# Altium PCB VirtualWire_BreadBoard.PcbDoc
Units mil, origin at the board's own origin, x right, y up, seen from the top; angles counter-clockwise.
Board outline 1550 x 950 mil, 2 copper layers (Top Layer, Bottom Layer); 1 components, 0 nets, 50 pads, 0 vias.
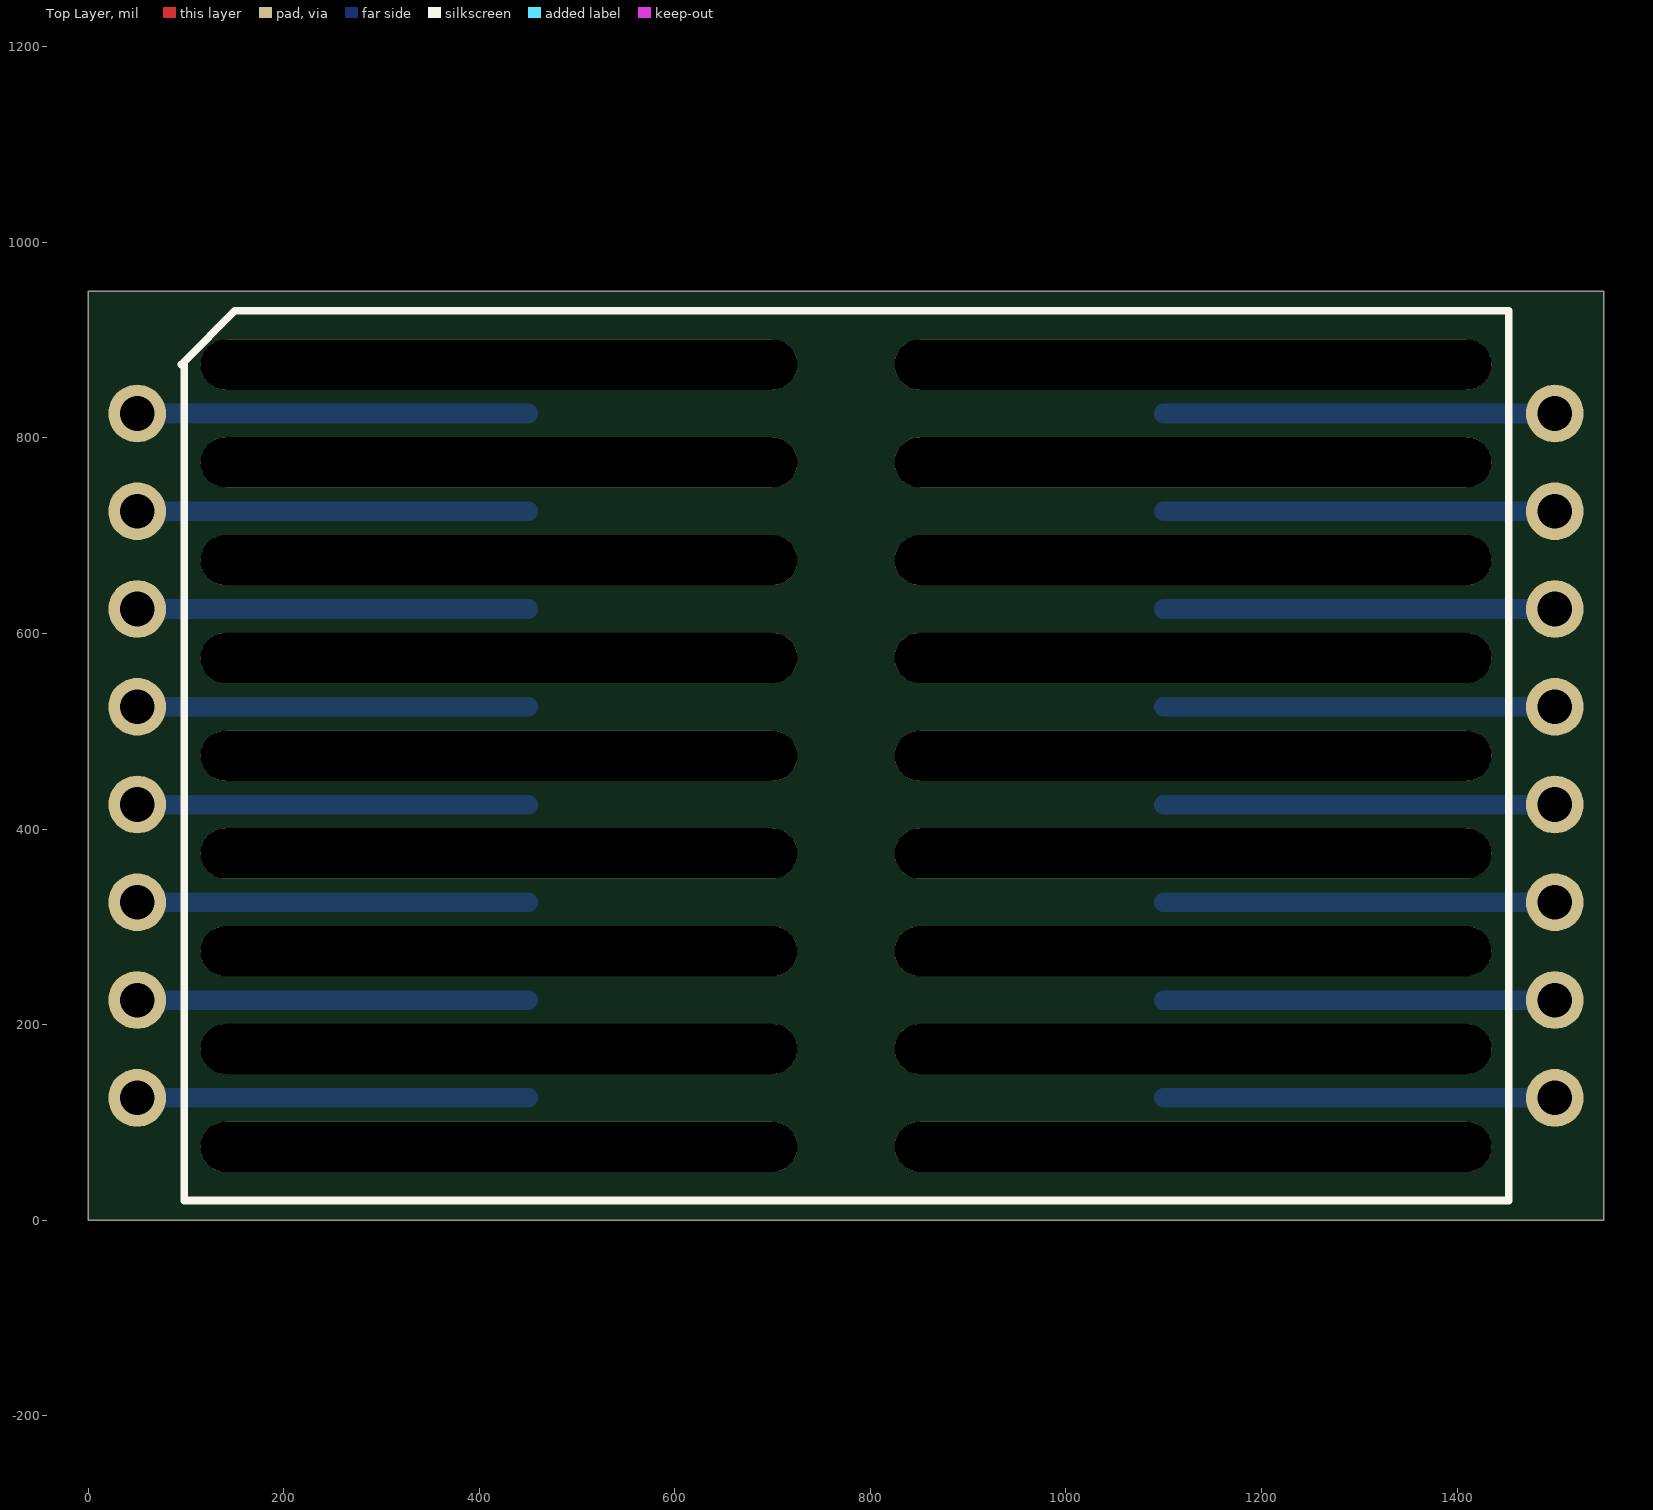
[diagram p0: Top Layer view]
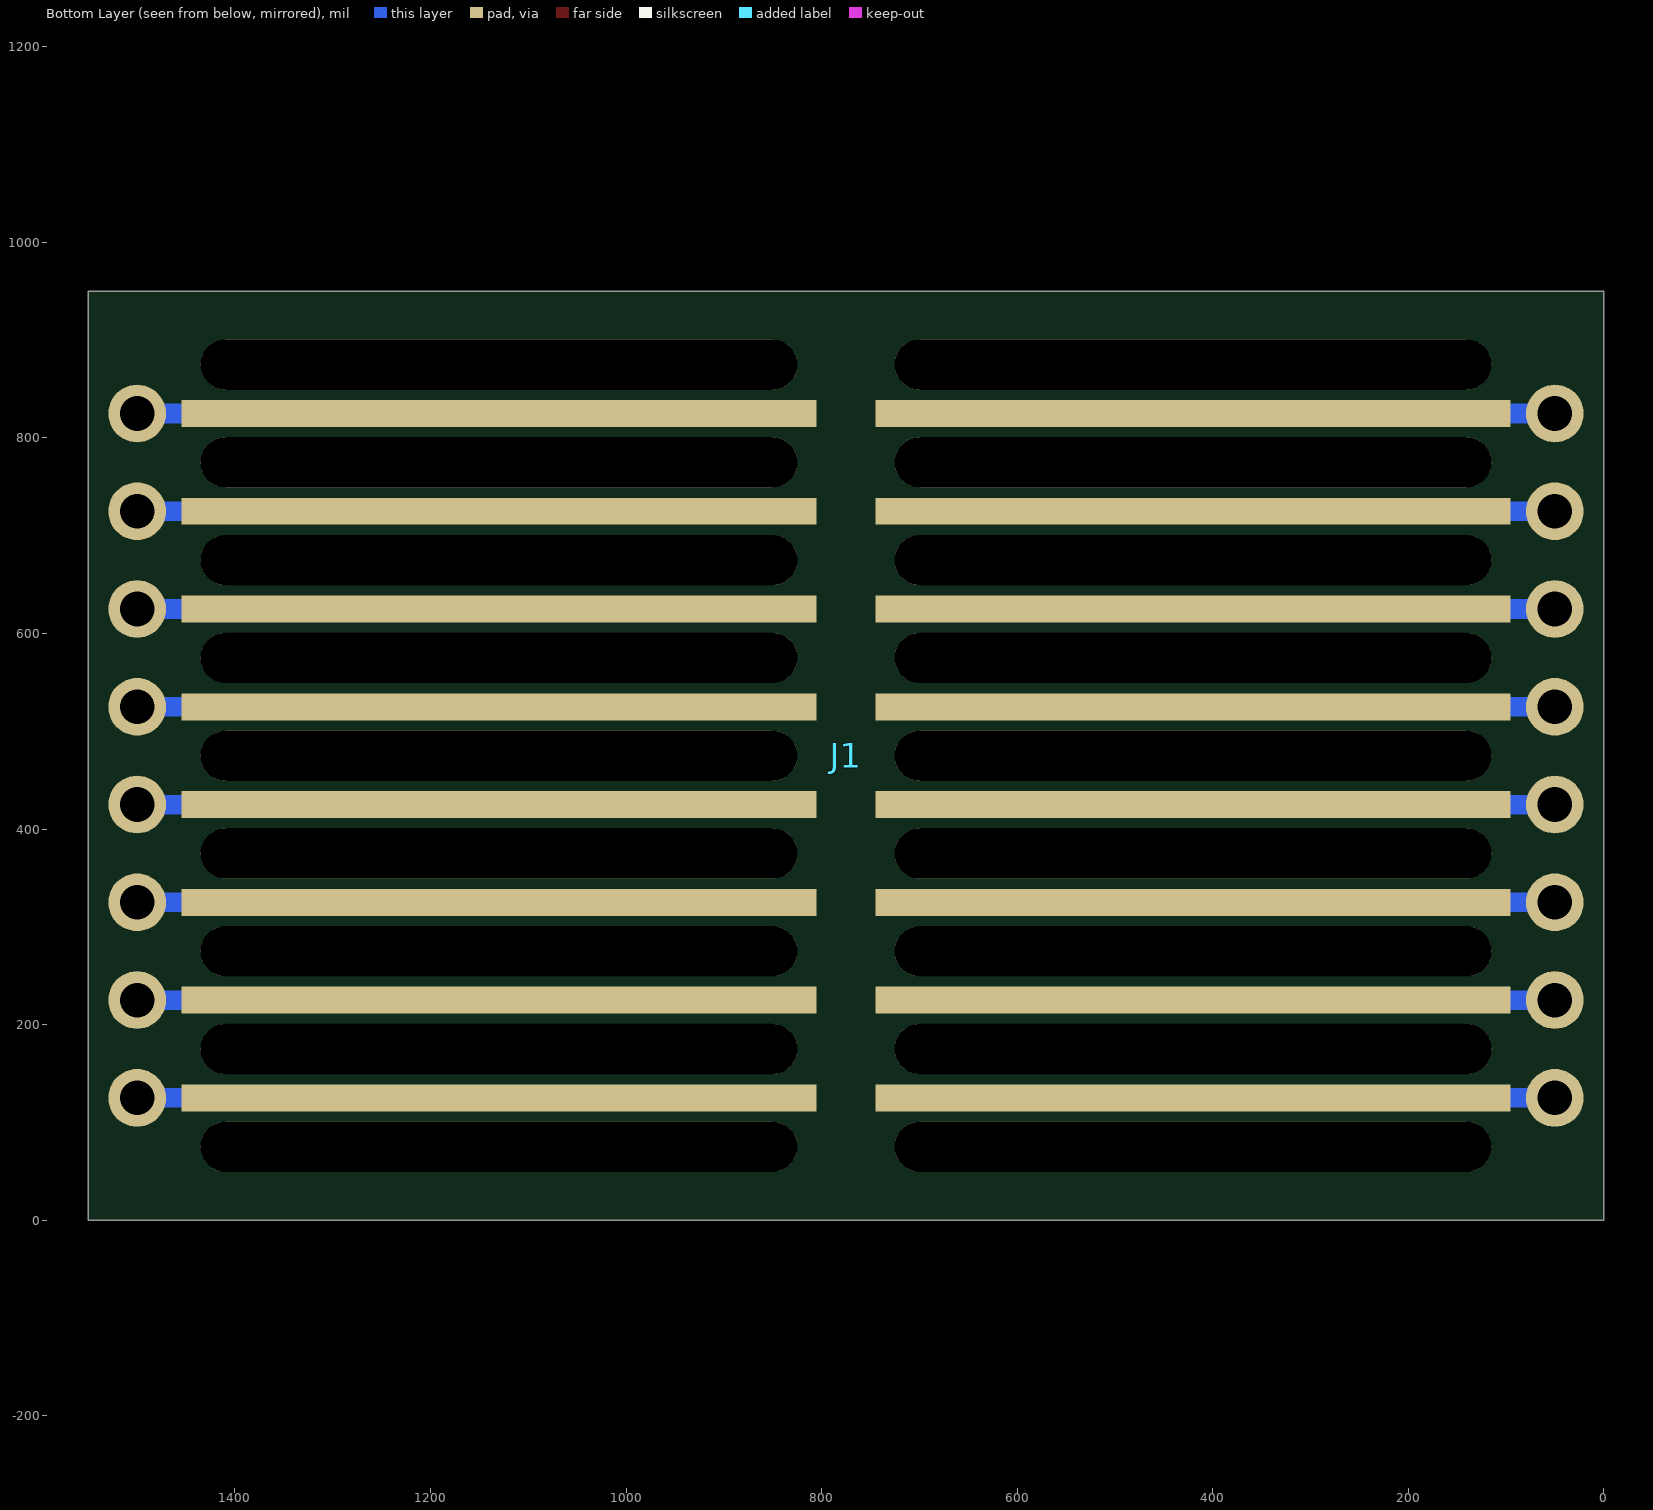
[diagram p1: Bottom Layer view, seen from below]

## Layer stack, top to bottom
Top Solder: solder mask 0.4, Solder Resist, Dk 3.5
Top Layer: signal copper 1.4
Dielectric 1: dielectric 12.6, FR-4, Dk 4.8
Bottom Layer: signal copper 1.4
Bottom Solder: solder mask 0.4, Solder Resist, Dk 3.5

## Board outline
0,0 1550,0 1550,950 0,950

## Design rules (kind name [scope] priority, off if disabled: settings)
Clearance [All] p1: gap=10 ignorepadtopadclearanceinfootprint=FALSE except(0: Arc-Hole Track-Hole SMDPad-Hole THPad-Hole Via-Hole Fill-Hole Poly-Hole Region-Hole Text-Hole)
HoleSize [All] p1: absolutevalues=TRUE maxlimit=10000 minlimit=1 maxpercent=80.000 minpercent=20.000
MinimumSolderMaskSliver [All] p1: minsoldermaskwidth=0.2
PolygonConnect [All] p1: connectstyle=Relief reliefconductorwidth=10 reliefentries=4 polygonreliefangle="90 Angle" airgapwidth=10
RoutingVias [All] p1: holewidth=28 width=50 viastyle="Through Hole" minholewidth=28 minwidth=50 maxholewidth=28 maxwidth=50
SolderMaskExpansion [All] p1: expansion=10
Width [All] p1: maxlimit=20 minlimit=10 preferedwidth=10
28 further rules are at their usual default settings.

## Components (designator, comment, footprint, x,y, rotation, side; value= is the part's Value field where it differs from the comment)
J1 "MiniBreadbaord" "MINI_BREADBOARD HOLE" 775,475 r0 top

## Footprints (in the part's own frame and the unit in brackets; to place one, negate y for a bottom-side part, rotate by r counter-clockwise, add the part's x,y. Pads: shape width x height; smd on the part's side, far side on the other; paste and mask are expansions set on the pad)
"MINI_BREADBOARD HOLE" [mm]
  round 1.5 hole 0.9: 1(-18.415,8.89) 2(-18.415,6.35) 3(-18.414,3.81) 4(-18.415,1.27) 5(-18.414,-1.27) 6(-18.415,-3.81) 7(-18.415,-6.35) 8(-18.415,-8.89) 9(18.415,8.89) 10(18.415,6.35) 11(18.415,3.81) 12(18.415,1.27) 13(18.415,-1.27) 14(18.415,-3.81) 15(18.415,-6.35) 16(18.415,-8.89)
  rect 16.5x0.7 smd far side mask+0.05: 1(-9.017,8.89) 2(-9.017,6.35) 3(-9.017,3.81) 4(-9.017,1.27) 5(-9.017,-1.27) 6(-9.017,-3.81) 7(-9.017,-6.35) 8(-9.017,-8.89) 9(9.017,8.89) 10(9.017,6.35) 11(9.017,3.81) 12(9.017,1.27) 13(9.017,-1.27) 14(9.017,-3.81) 15(9.017,-6.35) 16(9.017,-8.89)
  rrect100% 15.5x1.3 hole 1.3 slot 15.5 at 0 deg unplated mask+0.05: ""(-9.017,-10.16) ""(-9.017,-7.62) ""(-9.017,-5.08) ""(-9.017,-2.54) ""(-9.017,0) ""(-9.017,2.54) ""(-9.017,5.08) ""(-9.017,7.62) ""(-9.017,10.16) ""(9.017,-10.16) ""(9.017,-7.62) ""(9.017,-5.08) ""(9.017,-2.54) ""(9.017,0) ""(9.017,2.54) ""(9.017,5.08) ""(9.017,7.62) ""(9.017,10.16)
  silkscreen extent -17.27,-11.56 17.22,11.56, body extent -17.25,-11.35 43.31,15.24, height 22.75

## Part data
J1: library part MINI_BREADBOARD_16, "Mini Breadboard", Colour=Natural, Manufacturer="TE Connectivity AMP", Manufacturer Part Number=1738132-1, Supplier Part Number 1=1738132-1-ND, ComponentLink1Description=http://www.te.com/commerce/DocumentDelivery/DDEController?Action=srchrtrv&DocNm=1738132&DocType=Customer+Drawing&DocLang=English, ComponentLink1URL=http://www.te.com/commerce/DocumentDelivery/DDEController?Action=srchrtrv&DocNm=1738132&DocType=Customer+Drawing&DocLang=English, Gender=Male, Stock 1=0, Supplier 1=Digi-Key

## Nets (pads, with @x,y where several pads share a name; then routed paths per layer and width w, separated by ;. In a path a pad name is that pad's centre, name@x,y a point inside that pad or via, vN(x,y) a via of type N, cw(c..) or ccw(c..) an arc to the next point about the centre after c; other vN are vias at no path point)
pads on no net: J1. J1.1 J1.2 J1.3 J1.4 J1.5 J1.6 J1.7 J1.8 J1.9 J1.10 J1.11 J1.12 J1.13 J1.14 J1.15 J1.16
copper on no net: | length 6400
  Bottom Layer w20: 50,125 450,125 ; 50,225 450,225 ; 50,325 450,325 ; 50,525 450,525 ; 50,725 450,725 ; 50,825 450,825 ; 50.04,425 450.04,425 ; 50.04,625 450.04,625 ; 1100,125 1500,125 ; 1100,225 1500,225 ; 1100,325 1500,325 ; 1100,425 1500,425 ; 1100,525 1500,525 ; 1100,625 1500,625 ; 1100,725 1500,725 ; 1100,825 1500,825

## Silkscreen, mask and mechanical layers (free items; w line width, h text height)
Dimensions:
  the board outline again, w7.87